# Altium PCB Tray 1 Expansion Board Prototype.PcbDoc
Units mil, origin at the board's own origin, x right, y up, seen from the top; angles counter-clockwise.
Board outline 7344.69 x 1181.1 mil, 2 copper layers (Top Layer, Bottom Layer); 15 components, 17 nets, 114 pads, 14 vias.
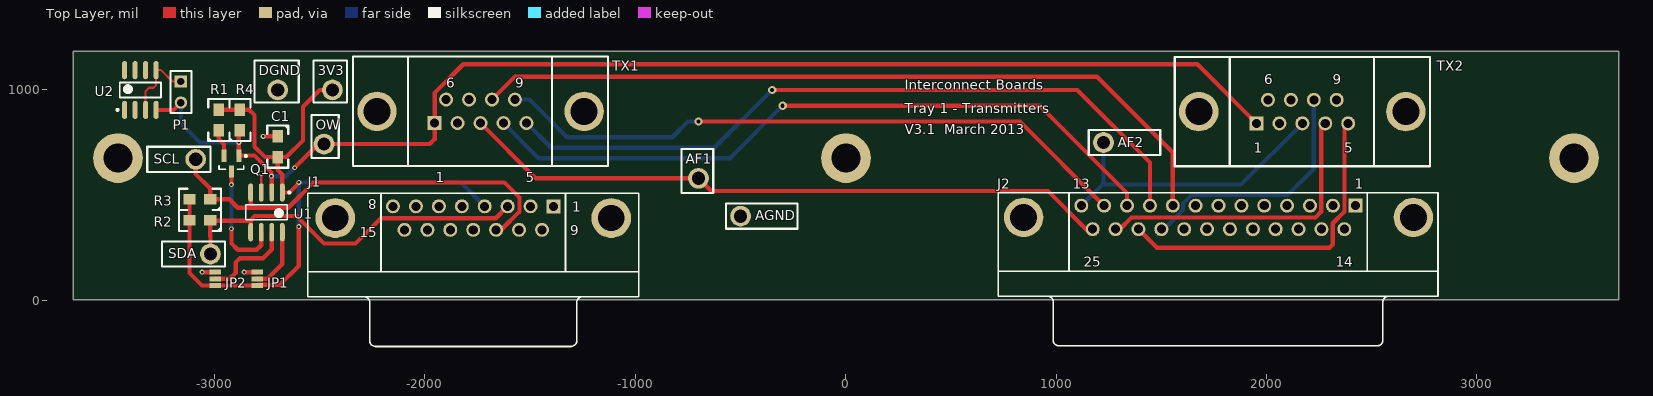
[diagram p0: Top Layer view]
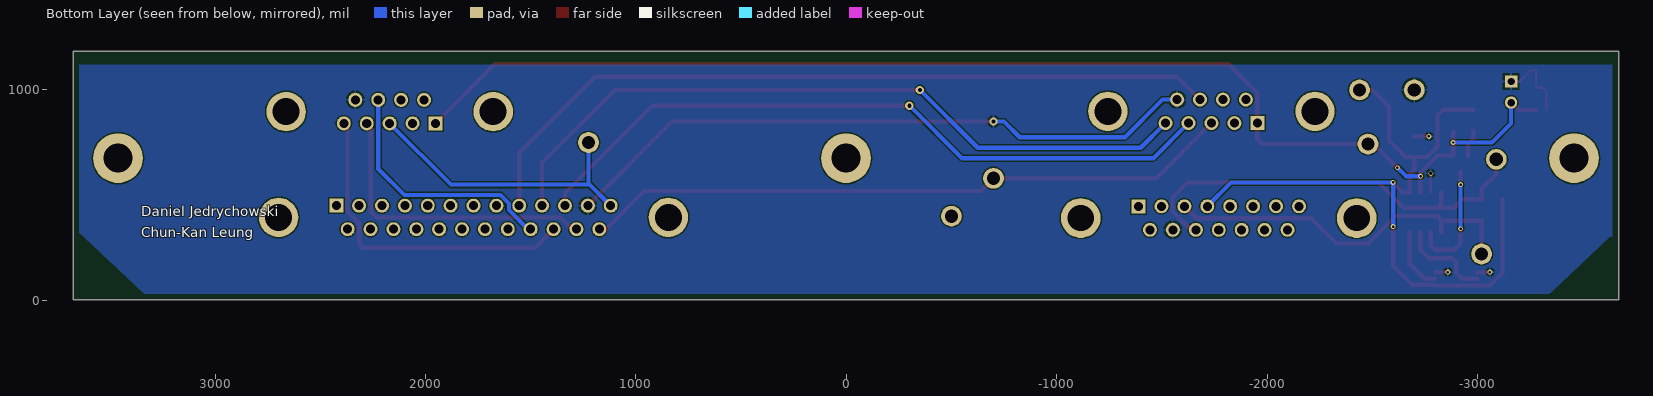
[diagram p1: Bottom Layer view, seen from below]

## Layer stack, top to bottom
Top Layer: signal copper 1.4
Dielectric: dielectric 12.6, FR-4, Dk 4.8
Bottom Layer: signal copper 1.4

## Board outline
-3671.26,1.97 -3671.26,1183.07 3673.43,1183.07 3673.43,1.97

## Design rules (kind name [scope] priority, off if disabled: settings)
Clearance [All] p1: gap=6
HoleSize [All] p1: absolutevalues=TRUE maxlimit=393.7 minlimit=1 maxpercent=80.000 minpercent=20.000
MinimumSolderMaskSliver [All] p1: minsoldermaskwidth=4
PolygonConnect [All] p1: connectstyle=Relief reliefconductorwidth=10 reliefentries=4 polygonreliefangle="90 Angle" airgapwidth=10
RoutingVias [All] p1: holewidth=15.75 width=23.62 viastyle="Through Hole" minholewidth=15.75 minwidth=23.62 maxholewidth=39.37 maxwidth=47.24
SilkToSolderMaskClearance SilkscreenOverComponentPads [IsPad] p1: minsilkscreentomaskgap=10 clearancetoexposedcopper=TRUE
SolderMaskExpansion [All] p1: expansion=4
Width [All] p1: maxlimit=100 minlimit=10 preferedwidth=10
25 further rules are at their usual default settings.

## Classes and differential pairs
component class Designator: U2
component class "Tray 1 Expansion Board Prototype": J1 J2 TX1 TX2

## Components (designator, comment, footprint, x,y, rotation, side; value= is the part's Value field where it differs from the comment)
C1 "0805 Cap" "0805 Cap" -2700,730 r90 top
J1 "D Connector 15" DSUB1.385-2H15 -1770.67,16.93 r180 top locked
J2 "D Connector 25" DSUB1.385-2H25A 1771.65,19.68 r180 top locked
JP1 "Jumper Select" SOLDER_JUMPER_3_A -2790,110 r270 top
JP2 "Jumper Select" SOLDER_JUMPER_3_A -2990,110 r270 top
P1 "Header 2" HDR1X2 -3160,1040 r270 top
Q1 "DMP2004K" DMP2004KDITR-ND -2920,650 r270 top
R1 "0805 Resistor" "0805 Resistor" -2980,856.69 r270 top
R2 "0805 Resistor" "0805 Resistor" -3070,380 r0 top
R3 "0805 Resistor" "0805 Resistor" -3070,480 r0 top
R4 "0603 Resistor" "0805 Resistor" -2880,856.69 r270 top
TX1 "D Connector 9" "DSUB Upright" -1736,898 r180 top locked
TX2 "D Connector 9" "DSUB Upright" 2170,897 r180 top locked
U1 "DS24820Z+_ND" DS2482-100 -2753.39,418.27 r270 top
U2 "TO-92" DS18S20 -3352.91,999.45 r90 top

## Footprints (in the part's own frame and the unit in brackets; to place one, negate y for a bottom-side part, rotate by r counter-clockwise, add the part's x,y. Pads: shape width x height; smd on the part's side, far side on the other; paste and mask are expansions set on the pad)
"0805 Cap" [mm] "0805 Capacitor"
  rect 1.5x1.25 smd: 1(1.25,0) 2(-1.25,0)
  silkscreen extent -2.54,-1.27 2.54,1.27, body extent -1,-0.63 1.1,0.63, height 0.9
"0805 Resistor" [mm] "0805 Resistor"
  rect 1.5x1.25 smd: 1(1.25,0) 2(-1.25,0)
  silkscreen extent -2.54,-1.27 2.54,1.27, body extent -1,-0.63 1.1,0.63, height 0.6
DMP2004KDITR-ND [mm] "SOT23, 3-Leads, Body 3.0x2.5mm (max), Pitch 0.89mm, IPC Medium Density"
  rect 1.5x0.6 smd: 1(-0.964,0.89) 2(-0.964,-0.89) 3(0.963,0)
  silkscreen extent -1.02,-1.5 0.7,1.87, body extent -0.7,-1.5 0.7,1.5, height 1.2
DS18S20 [mm] "SOIC, 8-Leads, Body 5.0x4.0mm (max), Pitch 1.27mm, IPC Medium Density"
  oval 2.2x0.6 smd: 1(-2.4,1.905) 2(-2.4,0.635) 3(-2.4,-0.635) 4(-2.4,-1.905) 5(2.4,-1.905) 6(2.4,-0.635) 7(2.4,0.635) 8(2.4,1.905)
  silkscreen extent -2.52,-2.5 0.9,2.88, body extent -2,-2.5 2,2.5, height 1.75
DS2482-100 [mm] "SOIC, 8-Leads, Body 5.0x4.0mm (max), Pitch 1.27mm, IPC Medium Density"
  oval 2.2x0.6 smd: 1(-2.4,1.905) 2(-2.4,0.635) 3(-2.4,-0.635) 4(-2.4,-1.905) 5(2.4,-1.905) 6(2.4,-0.635) 7(2.4,0.635) 8(2.4,1.905)
  silkscreen extent -2.52,-2.5 0.9,2.88, body extent -2,-2.5 2,2.5, height 1.75
DSUB1.385-2H15 [mm] "Connector; D Subminiature; 15 Position; Right Angle; Pitch 1.385 mm"
  rect 1.69x1.69 hole 1.09: 1(-9.695,-10.92)
  round 1.69 hole 1.09: 2(-6.925,-10.92) 3(-4.155,-10.92) 4(-1.385,-10.92) 5(1.385,-10.92) 6(4.155,-10.92) 7(6.925,-10.92) 8(9.695,-10.92) 9(-8.31,-8.08) 10(-5.54,-8.08) 11(-2.77,-8.08) 12(0,-8.08) 13(2.77,-8.08) 14(5.54,-8.08) 15(8.31,-8.08)
  round 4.8 hole 3.18: 16(-16.66,-9.5) 17(16.66,-9.5)
  silkscreen extent -20,-12.5 20,6
DSUB1.385-2H25A [mm] "Connector; D Subminiature; 25 Position; Right Angle; Pitch 1.385 mm"
  rect 1.69x1.69 hole 1.09: 1(-16.566,-10.92)
  round 1.69 hole 1.09: 2(-13.805,-10.92) 3(-11.044,-10.92) 4(-8.283,-10.92) 5(-5.522,-10.92) 6(-2.761,-10.92) 7(0,-10.92) 8(2.761,-10.92) 9(5.522,-10.92) 10(8.283,-10.92) 11(11.044,-10.92) 12(13.805,-10.92) 13(16.566,-10.92) 14(-15.185,-8.08) 15(-12.424,-8.08) 16(-9.663,-8.08) 17(-6.902,-8.08) 18(-4.141,-8.08) 19(-1.38,-8.08) 20(1.381,-8.08) 21(4.142,-8.08) 22(6.903,-8.08) 23(9.664,-8.08) 24(12.425,-8.08) 25(15.186,-8.08)
  round 4.76 hole 3.26: 26(-23.526,-9.5) 27(23.526,-9.5)
  silkscreen extent -26.5,-12.5 26.6,6
"DSUB Upright" [mm] "171-009-213R911"
  rect 1.69x1.69 hole 1.09: 1(5.54,1.42)
  round 1.69 hole 1.09: 2(2.77,1.42) 3(0,1.42) 4(-2.77,1.42) 5(-5.54,1.42) 6(4.153,-1.42) 7(1.384,-1.42) 8(-1.384,-1.42) 9(-4.153,-1.42)
  round 4.76 hole 3.26: 10(12.5,0) 11(-12.5,0)
  silkscreen extent -15.4,-6.6 15.4,6.6
HDR1X2 [mm] "Connector; Header; 2 Position"
  rect 1.5x1.5 hole 0.9: 1(0,0)
  round 1.5 hole 0.9: 2(2.54,0)
  silkscreen extent -1.27,-1.27 3.81,1.27
SOLDER_JUMPER_3_A [mm]
  rect 0.6x1.4 smd: 1(1,-0.2) 2(0.2,-0.2) 3(-0.6,-0.2)

## Part data
C1: library part "0805 MLCC - X7R, 10%", "0805 MLCC - X7R, 10%"
J1: "Receptacle Assembly, 15 Position, Right Angle"
J2: "Receptacle Assembly, 25 Position, Right Angle"
JP1 JP2: library part "Header 3", "Header, 3-Pin"
P1: "Header, 2-Pin"
Q1: "MOSFET P-CH 20V 600MA SOT23-3"
R1 R2 R3: library part "0805 Thick Film Resistor 1%", "0805 Thick Film Resistor 1%"
R4: library part "0603 Thick Film Resistor 1%", "0603 Thick Film Resistor 1%"
TX1 TX2: "Receptacle Assembly, 9 Position, Right Angle"
U2: library part DS18S20

## Free pads (board coordinates)
  round 236.22 hole 137.8: MP0(-3459.65,675.59) MP1(0.98,675.59) MP2(3461.61,675.59)
  round 98.43 hole 62.99: TP_1W(-2480,742.66) TP_3V3(-2440,1000) TP_AF1(-700,580) TP_AF2(1225,750) TP_AGND(-500,400) TP_DGND(-2700,1000) TP_SCL(-3090,670) TP_SDA(-3020,220)

## Via types
v1: diameter 23.62, hole 11.81, Top Layer to Bottom Layer, 10 vias
v2: diameter 39.37, hole 19.68, Top Layer to Bottom Layer, 3 vias
v3: diameter 23.62, hole 15.75, Top Layer to Bottom Layer, 1 vias

## Nets (pads, with @x,y where several pads share a name; then routed paths per layer and width w, separated by ;. In a path a pad name is that pad's centre, name@x,y a point inside that pad or via, vN(x,y) a via of type N, cw(c..) or ccw(c..) an arc to the next point about the centre after c; other vN are vias at no path point)
3V3: C1.2 J1.4 JP1.1 JP2.1 pad.TP_3V3 R1.2 R2.2 R3.2 R4.2 U1.1 | length 3475.9
  Top Layer w20: R3.2 R2.2 -3119.21,129.21 -3060.63,70.63 JP2.1 JP1.1 -2794.19,74.31 -2688.92,74.31 -2600,163.23 v1(-2600,350) ; R1.2 R4.2 -2835.91,905.91 -2810,880 -2810,730 -2760.79,680.79 C1.2 ; v1@-2603.54,553.54 -2644.33,512.76 U1.1 -2678.39,598.39 -2700,620 C1.2 ; pad.TP_3V3 -2500,1000 -2580,920 -2580,760 -2659.21,680.79 C1.2
  Bottom Layer w20: v1(-2600,350) v1(-2600,560) -1829.29,560 J1.4
9V1_TX1: J2.11 TX1.4 | length 3368.6
  Top Layer w20: v2(-300,925) 921.46,925 1336.85,509.61 J2.11
  Bottom Layer w20: TX1.4 -1459.85,675 -550,675 v2(-300,925)
9V1_TX2: J2.24 TX2.4 | length 1439.7
  Top Layer w20: J2.24 1302.36,337.8 1358.27,393.7 2232.28,393.7 2259.84,421.26 2259.84,821.88 TX2.4
13V6_TX1: J2.10 TX1.5 | length 3473.8
  Top Layer w20: v2(-350,1000) 1100,1000 1445.55,654.45 J2.10
  Bottom Layer w20: TX1.5 -1517.09,842.09 -1400,725 -625,725 v2(-350,1000)
13V6_TX2: J2.23 TX2.5 | length 1572.8
  Top Layer w20: J2.23 1479,250 2300,250 2314.96,264.96 2314.96,366.14 2370.08,421.26 2370.08,823.06 TX2.5
AF_TX1: J2.25 pad.TP_AF1 TX1.3 | length 3118.7
  Top Layer w20: TX1.3 -1473.91,580 pad.TP_AF1 -639.68,519.68 960.63,519.68 1142.52,337.8 J2.25
AF_TX2: J2.13 pad.TP_AF2 TX2.3 | length 1414.8
  Bottom Layer w20: J2.13 1219.84,550 ; pad.TP_AF2 1225,555.16 1219.84,550 ; TX2.3 1878.91,550 1219.84,550
GND: C1.1 J1.10 J2.12 JP1.3 JP2.3 P1.1 pad.TP_DGND TX1.9 TX2.9 U1.3 U2.3 U2.5 | length 3722.8
  Top Layer w10: U2.3@-3327.8,904.84 U2.3 -3327.91,994.13 -3312.05,1010 -3290,1010 -3277.91,1022.09 U2.5 -3253.94,1093.94 -3200,1040 P1.1 ; U1.3 v3(-2778.39,603.27)
  Top Layer w20: v1(-3059.37,133.62) JP2.3 ; v1(-2859.37,133.62) JP1.3 ; v1(-2769.21,779.21) C1.1 ; TX1.9 TX1.9@-1567.1,953.91 ; v2(-700,850) 827.76,850 J2.12
  Bottom Layer w20: TX1.9 -1503.91,953.91 -1325,775 -825,775 -750,850 v2(-700,850)
NetJP1_2: JP1.2 U1.8 | length 300.4
  Top Layer w20: JP1.2 -2747.87,102.13 -2678.39,171.61 U1.8
NetJP2_2: JP2.2 U1.7 | length 438.7
  Top Layer w20: JP2.2 -2927.87,102.13 -2900,130 -2900,180 -2880,200 -2770,200 -2728.39,241.61 U1.7
NetQ1_2: Q1.2 R1.1 | length 133.2
  Top Layer w20: R1.1 -2980,766.69 -2955.04,741.73 Q1.2@-2955.04,684.63
NetQ1_3: Q1.3 U1.6 | length 567.2
  Top Layer w20: v1(-2920,340) -2920,270 -2890,240 -2800,240 -2778.39,261.61 U1.6 ; v1(-2920,550) Q1.3
  Bottom Layer w20: v1(-2920,340) v1(-2920,550)
ONEWIRE: P1.2 pad.TP_1W Q1.1 R4.1 TX1.1 TX2.1 U1.2 U2.4 | length 6089.8
  Top Layer w20: U2.4 -3195.04,904.96 P1.2 ; R4.1@-2884.96,802.52 v1(-2884.96,750) Q1.1 -2809.98,687.93 -2730,607.95 v1(-2730,590) ; U1.2@-2728.74,513.11 v1@-2728.74,590 ; v1(-2620,630) -2507.34,742.66 -1977.34,742.66 -1954.11,765.89 TX1.1 -1954.11,985.89 -1817.95,1122.05 1670.94,1122.05 TX2.1
  Bottom Layer w20: P1.2 -3160,840 -3070,750 v1(-2884.96,750) ; v1(-2730,590) -2660,590 v1(-2620,630)
SCL_TELEM_TX: J1.11 pad.TP_SCL R3.1 U1.4 | length 2077.7
  Top Layer w20: pad.TP_SCL -3090,600 -3020.79,530.79 R3.1 -2930,480 -2890,440 -2810,440 ; U1.4 -2828.39,458.39 -2810,440 ; J1.11 -1637.4,335.04 -1551.18,421.26 -1551.18,488.19 -1622.99,560 -2530,560 -2650,440 -2810,440
SDA_TELEM_TX: J1.3 pad.TP_SDA R2.1 U1.5 | length 1766
  Top Layer w20: pad.TP_SDA R2.1 -3019.17,378.39 -2828.39,378.39 U1.5 ; -2830,380 -2810,400 -2610,400 -2480,270 -2330,270 -2210,390 -1663.94,390 J1.3
VVAR_TX1: J2.9 TX1.8 | length 3682.7
  Top Layer w20: TX1.8 -1572.41,1062.99 1192.91,1062.99 1554.25,701.65 J2.9
VVAR_TX2: J2.22 TX2.8 | length 1189.7
  Bottom Layer w20: J2.22 1512.12,337.8 1603.52,429.2 1603.52,459.85 1643.67,500 2100,500 2224.5,624.5 TX2.8
pads on no net: J1.1 J1.2 J1.5 J1.6 J1.7 J1.8 J1.9 J1.12 J1.13 J1.14 J1.15 J1.16 J1.17 J2.1 J2.2 J2.3 J2.4 J2.5 J2.6 J2.7 J2.8 J2.14 J2.15 J2.16 J2.17 J2.18 J2.19 J2.20 J2.21 J2.26 J2.27 TX1.2 TX1.6 TX1.7 TX1.10 TX1.11 TX2.2 TX2.6 TX2.7 TX2.10 TX2.11 U2.1 U2.2 U2.6 U2.7 U2.8

## Polygon pours and split planes (outlines as drawn)
GND on Bottom Layer "Top Layer-No Net" (solid, pour order 7): -3640,1120 -3640,302.5 -3630.05,302.5 -3351.39,39.4 -3341.43,30 3316.58,30 3336.48,30 3625.1,302.5 3645,321.29 3645,1120

## Silkscreen, mask and mechanical layers (free items; w line width, h text height)
Top Overlay:
  lines w10: -3320,610 -3320,630 -3320,730 -3020,730 -3020,670 -3020,610 -3320,610 ; -3250,160 -3250,180 -3250,280 -2950,280 -2950,220 -2950,160 -3250,160 ; -2810,940 -2810,1130 -2810,1140 -2600,1140 -2600,940 -2810,940 ; -2540,675.59 -2540,880 -2410,880 -2410,740 -2410,675.59 -2540,675.59 ; -2530,940 -2530,1140 -2370,1140 -2370,950 -2370,940 -2530,940 ; -780,510 -630,510 -630,720 -780,720 -780,510 ; -570,340 -570,410 -570,460 -230,460 -230,340 -570,340 ; 1155,690 1495,690 1495,810 1155,810 1155,760 1155,690
  text "DGND" at -2790,1070 h47.24
  text "3V3" at -2510,1070 h47.24
  text "Interconnect Boards" at 280,1000 h47.24
  text "Tray 1 - Transmitters" at 280,890 h47.24
  text "OW" at -2520,810 h47.24
  text "V3.1  March 2013" at 280,790 h47.24
  text "AF2" at 1292.87,727.87 h47.24
  text "SCL" at -3290,650 h47.24
  text "AF1" at -760,650 h47.24
  text "AGND" at -430,380 h47.24
  text "SDA" at -3220,200 h47.24
Bottom Overlay:
  text "Daniel Jedrychowski" at 3350,400 h47.24
  text "Chun-Kan Leung" at 3350,300 h47.24
Mechanical 1:
  lines w3.94: -3660.43,356.3 ccw(c-3306.1,356.3) -3306.1,1.97 3308.07,1.97 ccw(c3308.07,356.3) 3662.4,356.3 3662.4,1163.39 -3660.43,1163.39 -3660.43,356.3

## Text inside footprints (layer, text, board x,y; h text height)
J1: Top Overlay "9" at -1310,310 h47.24; Top Overlay "15" at -2310,300 h47.24; Top Overlay "8" at -2230,480 h47.24 r180; Top Overlay "1" at -1300,420 h47.24
J2: Top Overlay "1" at 2420,530 h47.24; Top Overlay "13" at 1080,530 h47.24; Top Overlay "14" at 2330,160 h47.24; Top Overlay "25" at 1130,160 h47.24
TX1: Top Overlay "9" at -1570,1010 h47.24; Top Overlay "6" at -1900,1010 h47.24; Top Overlay "5" at -1520,560 h47.24; Top Overlay "1" at -1950,560 h47.24
TX2: Top Overlay "9" at 2315,1027 h47.24; Top Overlay "6" at 1990,1027 h47.24; Top Overlay "5" at 2370,702 h47.24; Top Overlay "1" at 1940,702 h47.24